# Altium PCB Lite Carrier for Mu.PcbDoc (part 13 of 15)
Units mm, origin at the board's own origin, x right, y up, seen from the top; angles counter-clockwise.
Board outline 146 x 102 mm, 20 copper layers (F.Cu, F.Mask, B.Cu, B.Mask, In1.Cu, F.SilkS, In2.Cu, B.SilkS, F.Adhes, B.Adhes, F.Paste, B.Paste, Dwgs.User, Cmts.User, Eco1.User, Eco2.User, Edge.Cuts, Margin, B.CrtYd, F.CrtYd); 254 components, 382 nets, 1258 pads, 1020 vias.
Unrouted connection lines stored in the file: 113.
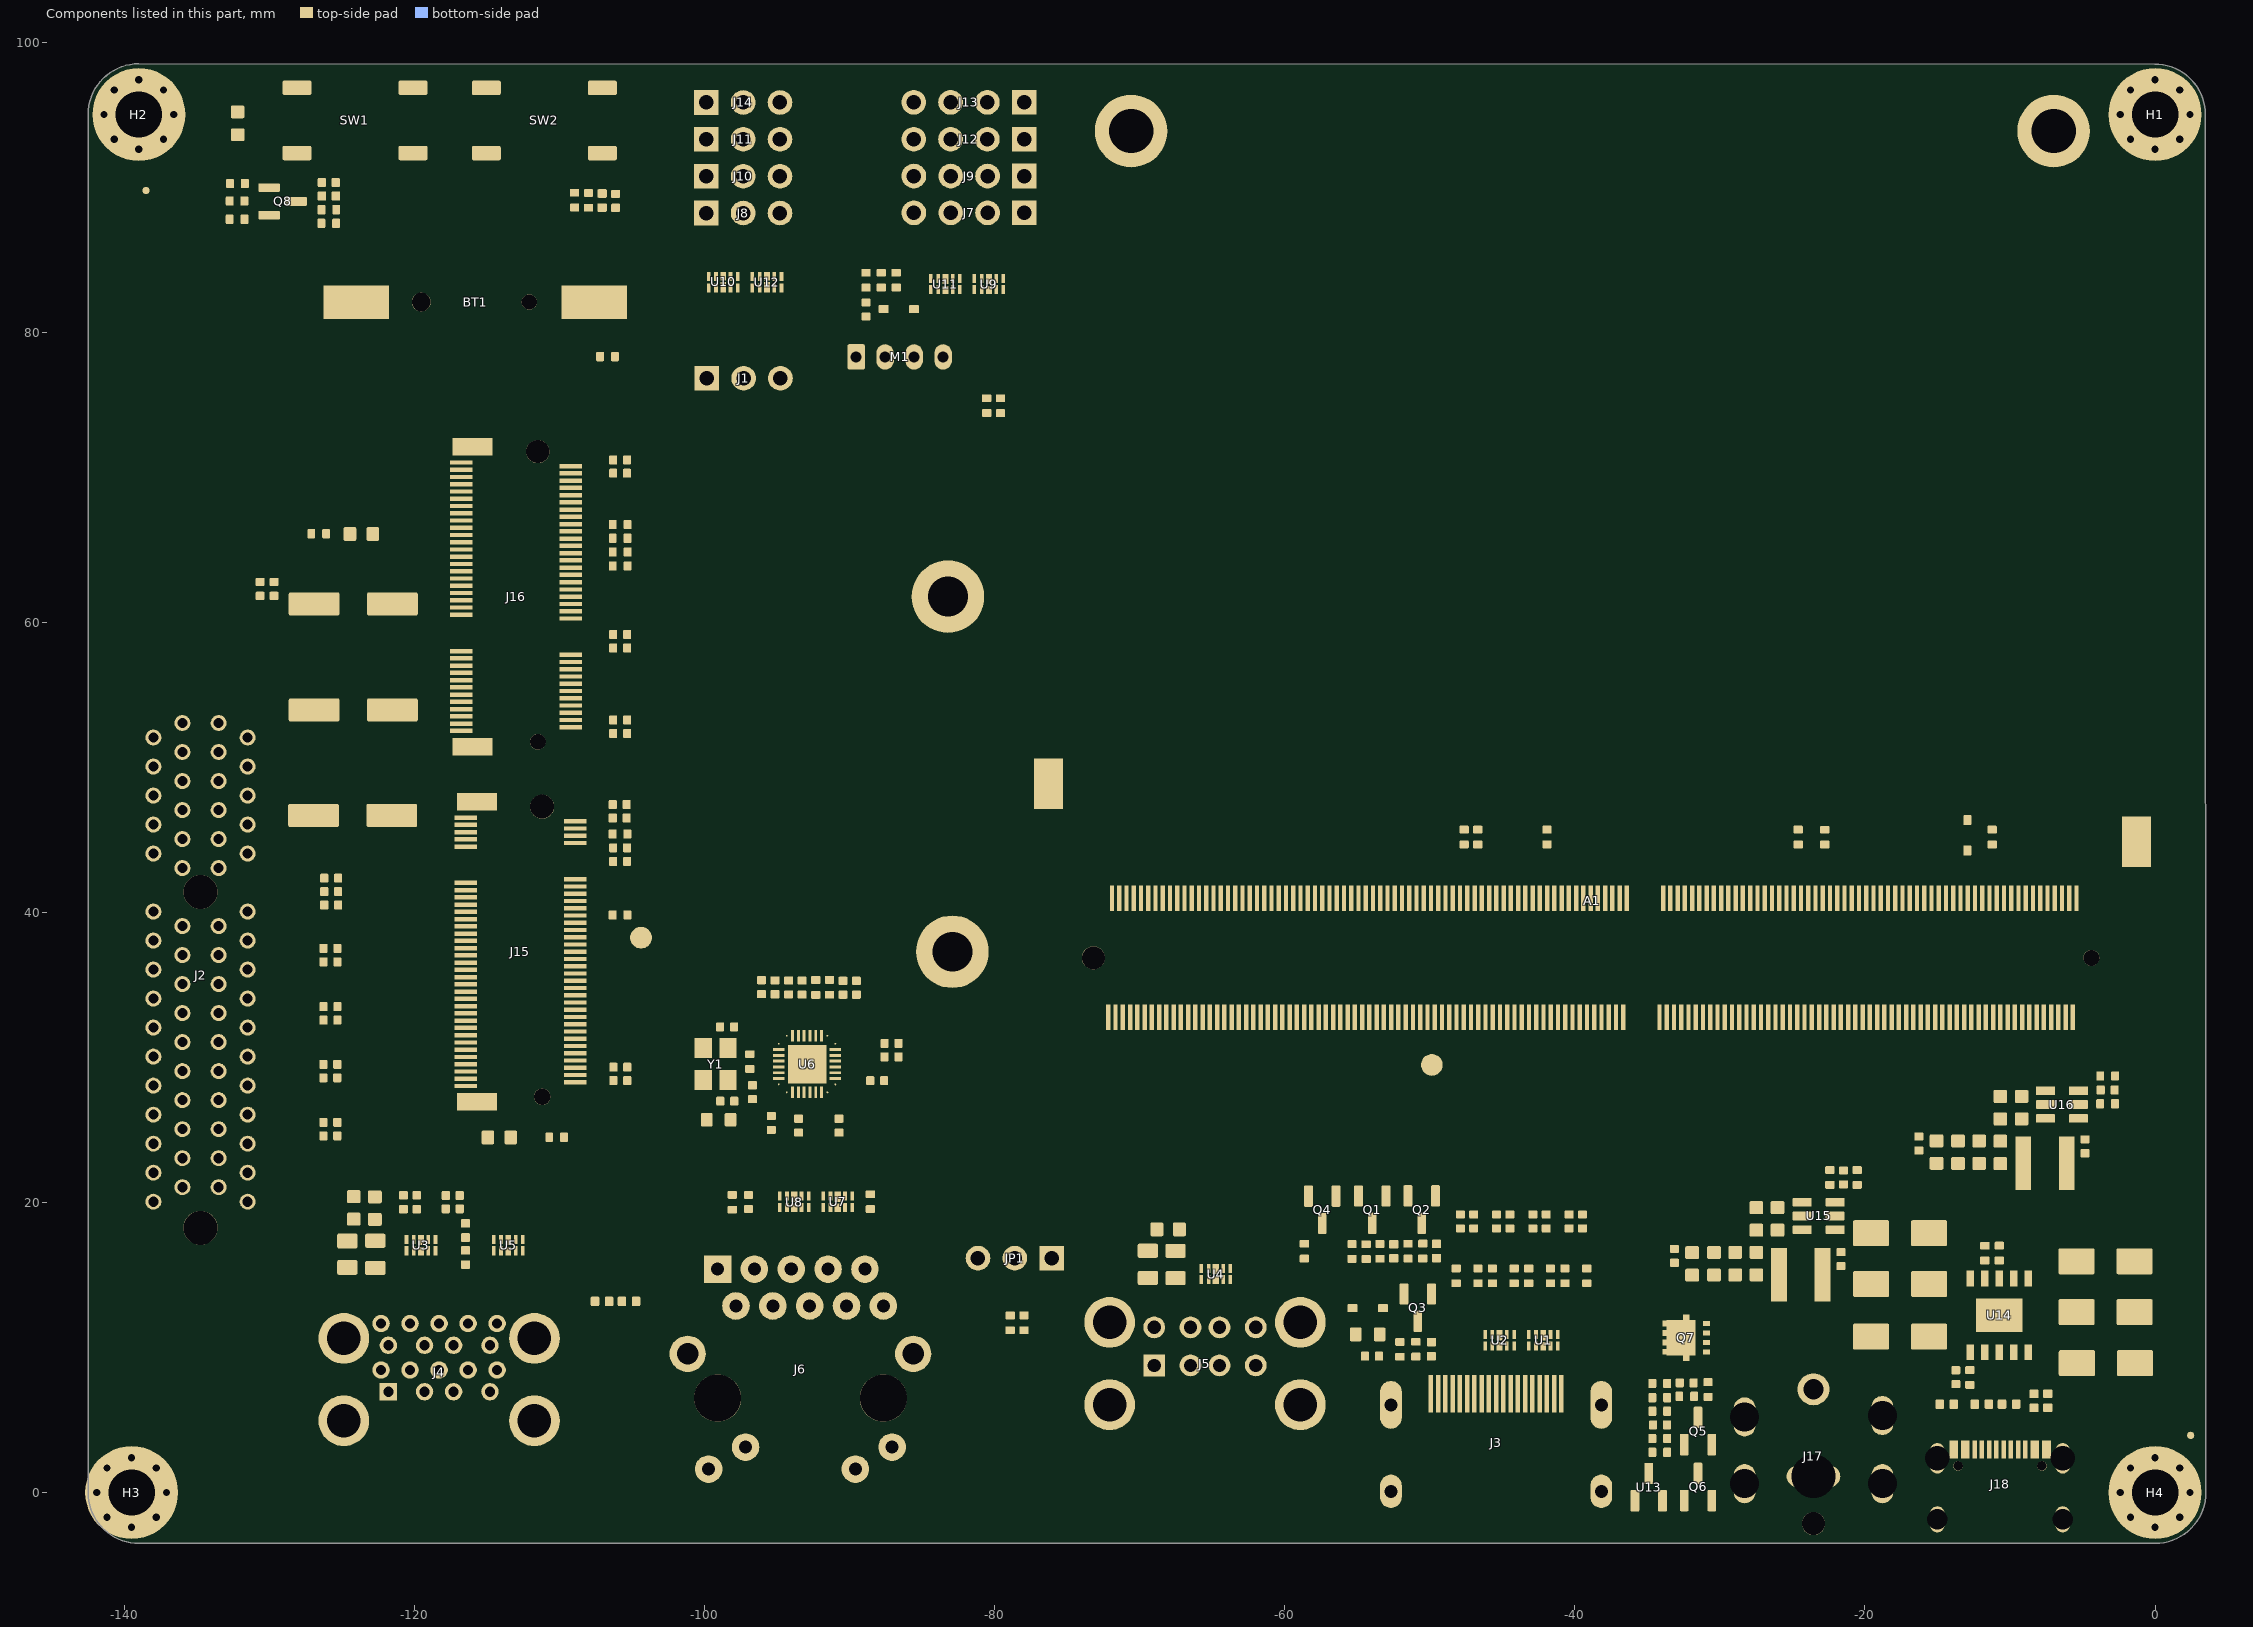
[diagram p23: the components of this part, seen from the top]

## Polygon pours and split planes (outlines as drawn) (continued)
HSIO_3_TX- on F.Cu "F.Cu-/LattePanda Module/HSIO_3_TX--1" (solid, remove dead copper, pour order 31537): 24 vertices, not listed, extent -105.378,58.736 -104.837,59.301
HSIO_11_TX- on F.Cu "F.Cu-/LattePanda Module/HSIO_11_TX-" (solid, remove dead copper, pour order 31538): 24 vertices, not listed, extent -125.358,24.439 -124.817,25.004
HSIO_3_TX+ on F.Cu "F.Cu-/LattePanda Module/HSIO_3_TX+" (solid, remove dead copper, pour order 31539): 24 vertices, not listed, extent -105.378,58.069 -104.837,58.634
HSIO_9_TX- on F.Cu "F.Cu-/LattePanda Module/HSIO_9_TX--2" (solid, remove dead copper, pour order 31540): 24 vertices, not listed, extent -125.348,32.419 -124.807,32.984
HSIO_8_TX- on F.Cu "F.Cu-/LattePanda Module/HSIO_8_TX--2" (solid, remove dead copper, pour order 31541): 24 vertices, not listed, extent -125.348,36.429 -124.807,36.994
HSIO_10_TX- on F.Cu "F.Cu-/LattePanda Module/HSIO_10_TX--2" (solid, remove dead copper, pour order 31542): 24 vertices, not listed, extent -125.358,28.439 -124.816,29.003
HSIO_10_TX+ on F.Cu "F.Cu-/LattePanda Module/HSIO_10_TX+" (solid, remove dead copper, pour order 31543): 24 vertices, not listed, extent -125.358,29.104 -124.816,29.668
HSI- on F.Cu "F.Cu-/Gigabit Ethernet/HSI-" (solid, remove dead copper, pour order 31544): 24 vertices, not listed, extent -88.095,30.55 -87.553,31.112
HSI+ on F.Cu "F.Cu-/Gigabit Ethernet/HSI+" (solid, remove dead copper, pour order 31545): 24 vertices, not listed, extent -88.095,29.885 -87.553,30.448
GbE_PCIe_TX- on F.Cu "F.Cu-/Gigabit Ethernet/GbE_PCIe_TX-" (solid, remove dead copper, pour order 31546): 24 vertices, not listed, extent -86.667,30.55 -86.125,31.112
GbE_PCIe_TX+ on F.Cu "F.Cu-/Gigabit Ethernet/GbE_PCIe_TX+" (solid, remove dead copper, pour order 31547): 24 vertices, not listed, extent -86.667,29.885 -86.125,30.448
Net-(Q7-G) on F.Cu "F.Cu-Net-(Q7-G)-1" (solid, remove dead copper, pour order 31548): 24 vertices, not listed, extent -31.41,7.353 -30.819,7.862
CON_USB4_SSTX_N on F.Cu "F.Cu-/USB2.0&USB3.0/CON_USB4_SSTX_N-1" (solid, remove dead copper, pour order 31549): 24 vertices, not listed, extent -118.345,19.407 -117.804,19.969
CON_USB4_SSTX_P on F.Cu "F.Cu-/USB2.0&USB3.0/CON_USB4_SSTX_P-2" (solid, remove dead copper, pour order 31550): 24 vertices, not listed, extent -118.345,20.071 -117.804,20.633
HSIO_1_TX- on F.Cu "F.Cu-/LattePanda Module/HSIO_1_TX-" (solid, remove dead copper, pour order 31551): 24 vertices, not listed, extent -116.916,19.407 -116.375,19.969
HSIO_1_TX+ on F.Cu "F.Cu-/LattePanda Module/HSIO_1_TX+-1" (solid, remove dead copper, pour order 31552): 24 vertices, not listed, extent -116.916,20.071 -116.375,20.633
+3V3 on F.Cu "F.Cu-+3V3-8" (solid, remove dead copper, pour order 31553): 24 vertices, not listed, extent -131.95,90.239 -131.43,90.83
+3V3 on F.Cu "F.Cu-+3V3-41" (solid, remove dead copper, pour order 31554): 24 vertices, not listed, extent -105.57,65.789 -105.05,66.38
Net-(U13-REF) on F.Cu "F.Cu-Net-(U13-REF)-3" (solid, remove dead copper, pour order 31555): 24 vertices, not listed, extent -33.9,2.772 -33.38,3.363
+3V3 on F.Cu "F.Cu-+3V3-63" (solid, remove dead copper, pour order 31556): 24 vertices, not listed, extent -109.95,24.489 -109.43,25.08
{\C\L\K\R\E\Q\M\}\ on F.Cu "F.Cu-/M.2 E&M Key/~{CLKREQM}-1" (solid, remove dead copper, pour order 31557): 24 vertices, not listed, extent -106.6,39.819 -106.08,40.41
Net-(U16-FB) on F.Cu "F.Cu-Net-(U16-FB)-1" (solid, remove dead copper, pour order 31558): 24 vertices, not listed, extent -4.05,26.799 -3.53,27.39
+12V on F.Cu "F.Cu-+12V-5" (solid, remove dead copper, pour order 31559): 24 vertices, not listed, extent -33.06,6.632 -32.54,7.223
+12V on F.Cu "F.Cu-+12V-1" (solid, remove dead copper, pour order 31560): 24 vertices, not listed, extent -33.06,6.042 -32.54,6.633
Net-(U13-REF) on F.Cu "F.Cu-Net-(U13-REF)-2" (solid, remove dead copper, pour order 31561): 24 vertices, not listed, extent -33.9,2.183 -33.38,2.773
Net-(U13-REF) on F.Cu "F.Cu-Net-(U13-REF)" (solid, remove dead copper, pour order 31562): 24 vertices, not listed, extent -33.9,3.133 -33.38,3.724
+3V3 on F.Cu "F.Cu-+3V3-48" (solid, remove dead copper, pour order 31563): 24 vertices, not listed, extent -105.57,66.14 -105.05,66.731
Net-(U16-FB) on F.Cu "F.Cu-Net-(U16-FB)" (solid, remove dead copper, pour order 31564): 24 vertices, not listed, extent -4.04,28.13 -3.52,28.721
VPullup on F.Cu "F.Cu-VPullup-3" (solid, remove dead copper, pour order 31565): 24 vertices, not listed, extent -13.205,46.359 -12.675,47.051
PCIE30_TX2_P on F.Cu "F.Cu-/PCIe x4/PCIE30_TX2_P" (solid, remove dead copper, pour order 31566): 24 vertices, not listed, extent -126.779,29.104 -126.241,29.668
DDC_SCL on F.Cu "F.Cu-/HDMI/DDC_SCL-3" (solid, remove dead copper, pour order 31567): 24 vertices, not listed, extent -50.786,17.159 -50.249,17.7
Net-(D22-K) on F.Cu "F.Cu-Net-(D22-K)-1" (solid, remove dead copper, pour order 31568): 24 vertices, not listed, extent -128.464,89.009 -127.863,89.648
Net-(Q4-G) on F.Cu "F.Cu-Net-(Q4-G)" (solid, remove dead copper, pour order 31569): 24 vertices, not listed, extent -57.074,20.039 -56.467,20.664
Net-(U14-VDD) on F.Cu "F.Cu-Net-(U14-VDD)" (solid, remove dead copper, pour order 31570): 24 vertices, not listed, extent -13.027,8.439 -12.487,8.98
+3V3 on F.Cu "F.Cu-+3V3-15" (solid, remove dead copper, pour order 31571): 24 vertices, not listed, extent -52.176,9.299 -51.599,9.823
DDI_B_HPD on F.Cu "F.Cu-/HDMI/DDI_B_HPD-2" (solid, remove dead copper, pour order 31572): 24 vertices, not listed, extent -55.63,17.126 -55.09,17.668
Net-(U14-VBUS) on F.Cu "F.Cu-Net-(U14-VBUS)-1" (solid, remove dead copper, pour order 31573): 24 vertices, not listed, extent -11.01,15.46 -10.47,16.001
Net-(U14-CFG1) on F.Cu "F.Cu-Net-(U14-CFG1)-1" (solid, remove dead copper, pour order 31574): 24 vertices, not listed, extent -12.01,15.45 -11.47,15.991
Net-(Q8-G) on F.Cu "F.Cu-Net-(Q8-G)-1" (solid, remove dead copper, pour order 31575): 24 vertices, not listed, extent -132.044,88.476 -131.584,89.107
REFCLK3- on F.Cu "F.Cu-/LattePanda Module/REFCLK3-" (solid, remove dead copper, pour order 31576): 24 vertices, not listed, extent -116.78,64.311 -115.845,64.566
HSIO_3_RX- on F.Cu "F.Cu-/LattePanda Module/HSIO_3_RX-" (solid, remove dead copper, pour order 31577): 24 vertices, not listed, extent -116.78,62.811 -115.845,63.066
CON_PCIE_TX_0- on F.Cu "F.Cu-/M.2 E&M Key/CON_PCIE_TX_0--1" (solid, remove dead copper, pour order 31578): 24 vertices, not listed, extent -116.78,61.311 -115.845,61.566
REFCLK0- on F.Cu "F.Cu-/LattePanda Module/REFCLK0--1" (solid, remove dead copper, pour order 31579): 24 vertices, not listed, extent -116.48,41.331 -115.545,41.586
HSIO_2_RX+ on F.Cu "F.Cu-/LattePanda Module/HSIO_2_RX+-1" (solid, remove dead copper, pour order 31580): 24 vertices, not listed, extent -116.48,38.331 -115.545,38.586
CON_PCIE_TX_1+ on F.Cu "F.Cu-/M.2 E&M Key/CON_PCIE_TX_1+" (solid, remove dead copper, pour order 31581): 24 vertices, not listed, extent -116.48,39.831 -115.545,40.086
USB_2_P7+ on F.Cu "F.Cu-/LattePanda Module/USB_2_P7+" (solid, remove dead copper, pour order 31582): 24 vertices, not listed, extent -116.78,52.954 -115.845,53.209
HSIO_3_RX+ on F.Cu "F.Cu-/LattePanda Module/HSIO_3_RX+-2" (solid, remove dead copper, pour order 31583): 24 vertices, not listed, extent -116.78,62.454 -115.845,62.709
CON_PCIE_TX_0+ on F.Cu "F.Cu-/M.2 E&M Key/CON_PCIE_TX_0+" (solid, remove dead copper, pour order 31584): 24 vertices, not listed, extent -116.78,60.954 -115.845,61.209
REFCLK3+ on F.Cu "F.Cu-/LattePanda Module/REFCLK3+" (solid, remove dead copper, pour order 31585): 24 vertices, not listed, extent -116.78,63.954 -115.845,64.209
CON_PCIE_TX_1- on F.Cu "F.Cu-/M.2 E&M Key/CON_PCIE_TX_1-" (solid, remove dead copper, pour order 31586): 24 vertices, not listed, extent -116.48,39.474 -115.545,39.729
REFCLK0+ on F.Cu "F.Cu-/LattePanda Module/REFCLK0+-1" (solid, remove dead copper, pour order 31587): 24 vertices, not listed, extent -116.48,40.974 -115.545,41.229
HSIO_2_RX- on F.Cu "F.Cu-/LattePanda Module/HSIO_2_RX-" (solid, remove dead copper, pour order 31588): 24 vertices, not listed, extent -116.48,37.974 -115.545,38.229
USB_2_P7- on F.Cu "F.Cu-/LattePanda Module/USB_2_P7--2" (solid, remove dead copper, pour order 31589): 24 vertices, not listed, extent -116.78,53.311 -115.845,53.566
Net-(U6-CKXTAL2) on F.Cu "F.Cu-Net-(U6-CKXTAL2)-4" (solid, remove dead copper, pour order 31590): 24 vertices, not listed, extent -98.224,26.979 -97.686,27.57
Net-(D21-A2) on F.Cu "F.Cu-Net-(D21-A2)-3" (solid, remove dead copper, pour order 31591): 24 vertices, not listed, extent -126.657,89.72 -126.12,90.311
+3V3 on F.Cu "F.Cu-+3V3-18" (solid, remove dead copper, pour order 31592): 24 vertices, not listed, extent -106.85,29.04 -106.289,29.6
+12V on F.Cu "F.Cu-+12V-10" (solid, remove dead copper, pour order 31593): 24 vertices, not listed, extent -33.33,7.283 -32.769,7.842
DDC_SDA on F.Cu "F.Cu-/HDMI/DDC_SDA-3" (solid, remove dead copper, pour order 31594): 24 vertices, not listed, extent -50.966,10.13 -50.375,10.65
GND on F.Cu "F.Cu-GND-78" (solid, remove dead copper, pour order 31595): 24 vertices, not listed, extent -35.261,3.594 -34.625,4.242
+3V3 on F.Cu "F.Cu-+3V3-68" (solid, remove dead copper, pour order 31596): 24 vertices, not listed, extent -94.515,33.78 -93.99,34.341
GND on F.Cu "F.Cu-GND-52" (solid, remove dead copper, pour order 31597): 24 vertices, not listed, extent -64.975,14.843 -64.525,15.418
+3V3 on F.Cu "F.Cu-+3V3-34" (solid, remove dead copper, pour order 31598): 24 vertices, not listed, extent -91.975,35.08 -91.384,35.599
PWR_EN on F.Cu "F.Cu-/PSU/PWR_EN-4" (solid, remove dead copper, pour order 31599): 24 vertices, not listed, extent -78.57,10.93 -77.979,11.45
Net-(A1-TCP1_HPD) on F.Cu "F.Cu-Net-(A1-TCP1_HPD)" (solid, remove dead copper, pour order 31600): 24 vertices, not listed, extent -25.194,44.42 -24.603,44.94
GND on F.Cu "F.Cu-GND-131" (solid, remove dead copper, pour order 31601): 24 vertices, not listed, extent -25.194,45.44 -24.603,45.96
VPullup on F.Cu "F.Cu-VPullup-1" (solid, remove dead copper, pour order 31602): 24 vertices, not listed, extent -41.921,45.44 -41.33,45.96
GND on F.Cu "F.Cu-GND-168" (solid, remove dead copper, pour order 31603): 24 vertices, not listed, extent -24.605,45.44 -24.014,45.96
FAN_1_PWM on F.Cu "F.Cu-/Fan_Temp/FAN_1_PWM-2" (solid, remove dead copper, pour order 31604): 24 vertices, not listed, extent -80.551,75.18 -79.96,75.7
PWR_EN on F.Cu "F.Cu-/PSU/PWR_EN-5" (solid, remove dead copper, pour order 31605): 24 vertices, not listed, extent -78.931,10.93 -78.34,11.45
+15V on F.Cu "F.Cu-+15V-4" (solid, remove dead copper, pour order 31606): 24 vertices, not listed, extent -10.741,16.76 -10.15,17.28
VDC on F.Cu "F.Cu-VDC-2" (solid, remove dead copper, pour order 31607): 24 vertices, not listed, extent -11.231,44.42 -10.64,44.94
+3V3 on F.Cu "F.Cu-+3V3-51" (solid, remove dead copper, pour order 31608): 24 vertices, not listed, extent -92.336,35.07 -91.745,35.589
+3V3 on F.Cu "F.Cu-+3V3-26" (solid, remove dead copper, pour order 31609): 24 vertices, not listed, extent -2.761,28.45 -2.22,28.99
DDC_SDA on F.Cu "F.Cu-/HDMI/DDC_SDA" (solid, remove dead copper, pour order 31610): 24 vertices, not listed, extent -51.179,10.389 -50.655,10.93
+3V3 on F.Cu "F.Cu-+3V3-17" (solid, remove dead copper, pour order 31611): 24 vertices, not listed, extent -95.68,25.959 -95.12,26.52
+1V0 on F.Cu "F.Cu-+1V0" (solid, remove dead copper, pour order 31612): 24 vertices, not listed, extent -95.425,33.79 -94.865,34.351
GND on F.Cu "F.Cu-GND-156" (solid, remove dead copper, pour order 31613): 24 vertices, not listed, extent -49.886,9.111 -49.232,9.647
Net-(D25-A2) on F.Cu "F.Cu-Net-(D25-A2)" (solid, remove dead copper, pour order 31614): 24 vertices, not listed, extent -106.72,89.291 -106.129,89.799
{\P\W\R\_\L\E\D\}\{\s\l\a\s\h\}\{PSON} on F.Cu "F.Cu-/~{PWR_LED}{slash}~{PSON}-2" (solid, remove dead copper, pour order 31615): 24 vertices, not listed, extent -131.98,87.19 -131.46,87.781
DDI_B_DDC_SCL on F.Cu "F.Cu-/HDMI/DDI_B_DDC_SCL-2" (solid, remove dead copper, pour order 31616): 24 vertices, not listed, extent -51.77,17.149 -51.23,17.69
TMDS_CK- on F.Cu "F.Cu-/HDMI/TMDS_CK--2" (solid, remove dead copper, pour order 31617): 24 vertices, not listed, extent -48.038,17.779 -47.485,18.258
Net-(U6-CKXTAL2) on F.Cu "F.Cu-Net-(U6-CKXTAL2)-3" (solid, remove dead copper, pour order 31618): 24 vertices, not listed, extent -96.937,29.044 -96.338,29.511
Net-(Q4-D) on F.Cu "F.Cu-Net-(Q4-D)-7" (solid, remove dead copper, pour order 31619): 24 vertices, not listed, extent -48.455,15.449 -47.915,15.99
DDI_B_DDC_SDA on F.Cu "F.Cu-/HDMI/DDI_B_DDC_SDA-3" (solid, remove dead copper, pour order 31620): 24 vertices, not listed, extent -52.335,10.382 -51.795,10.923
GND on F.Cu "F.Cu-GND-100" (solid, remove dead copper, pour order 31621): 24 vertices, not listed, extent -52.799,17.122 -52.253,17.73
Net-(A1-TCP0_HPD) on F.Cu "F.Cu-Net-(A1-TCP0_HPD)" (solid, remove dead copper, pour order 31622): 24 vertices, not listed, extent -23.033,44.131 -22.493,44.672
+3V3 on F.Cu "F.Cu-+3V3-13" (solid, remove dead copper, pour order 31623): 24 vertices, not listed, extent -88.844,20.559 -88.304,21.1
Net-(D25-A2) on F.Cu "F.Cu-Net-(D25-A2)-3" (solid, remove dead copper, pour order 31624): 24 vertices, not listed, extent -108.27,89.589 -107.73,90.13
+3V3 on F.Cu "F.Cu-+3V3-28" (solid, remove dead copper, pour order 31625): 24 vertices, not listed, extent -91.655,35.339 -91.115,35.88
Net-(JP1-C) on F.Cu "F.Cu-Net-(JP1-C)-1" (solid, remove dead copper, pour order 31626): 24 vertices, not listed, extent -79.2,12.209 -78.66,12.75
Net-(Q4-G) on F.Cu "F.Cu-Net-(Q4-G)-1" (solid, remove dead copper, pour order 31627): 24 vertices, not listed, extent -58.92,17.149 -58.38,17.69
{\P\W\R\_\L\E\D\}\{\s\l\a\s\h\}\{PSON} on F.Cu "F.Cu-/~{PWR_LED}{slash}~{PSON}-1" (solid, remove dead copper, pour order 31628): 24 vertices, not listed, extent -58.92,15.59 -58.38,16.131
PWR_EN on F.Cu "F.Cu-/PSU/PWR_EN-9" (solid, remove dead copper, pour order 31629): 24 vertices, not listed, extent -78.25,10.65 -77.71,11.191
Net-(A1-{\B\I\O\S\_\S\E\L\}\)\ on F.Cu "F.Cu-Net-(A1-~{BIOS_SEL})-1" (solid, remove dead copper, pour order 31630): 24 vertices, not listed, extent -42.19,44.14 -41.65,44.681
VPullup on F.Cu "F.Cu-VPullup-7" (solid, remove dead copper, pour order 31631): 24 vertices, not listed, extent -13.49,46.094 -12.939,46.644
VPullup on F.Cu "F.Cu-VPullup-2" (solid, remove dead copper, pour order 31632): 24 vertices, not listed, extent -12.941,46.085 -12.39,46.635
+1V0 on F.Cu "F.Cu-+1V0-2" (solid, remove dead copper, pour order 31633): 24 vertices, not listed, extent -95.735,34.08 -95.144,34.619
+1V0 on F.Cu "F.Cu-+1V0-10" (solid, remove dead copper, pour order 31634): 24 vertices, not listed, extent -96.076,34.09 -95.485,34.629
Net-(U6-CKXTAL1) on F.Cu "F.Cu-Net-(U6-CKXTAL1)-4" (solid, remove dead copper, pour order 31635): 24 vertices, not listed, extent -97.073,30.219 -96.56,30.76
Net-(J16-SUSCLK) on F.Cu "F.Cu-Net-(J16-SUSCLK)-1" (solid, remove dead copper, pour order 31636): 24 vertices, not listed, extent -106.87,64.538 -106.329,65.074
+12V on F.Cu "F.Cu-+12V-6" (solid, remove dead copper, pour order 31637): 24 vertices, not listed, extent -33.641,7.27 -33.1,7.81
Net-(J16-{\W\_\D\I\S\A\B\L\E\2\}\)\ on F.Cu "F.Cu-Net-(J16-~{W_DISABLE2})" (solid, remove dead copper, pour order 31638): 24 vertices, not listed, extent -106.87,65.507 -106.329,66.047
Net-(D9-A) on F.Cu "F.Cu-Net-(D9-A)-1" (solid, remove dead copper, pour order 31639): 24 vertices, not listed, extent -111.25,24.216 -110.709,24.756
{\C\L\K\R\E\Q\E\}\ on F.Cu "F.Cu-/M.2 E&M Key/~{CLKREQE}-1" (solid, remove dead copper, pour order 31640): 24 vertices, not listed, extent -106.87,63.61 -106.329,64.15
Net-(BT1-+) on F.Cu "F.Cu-Net-(BT1-+)" (solid, remove dead copper, pour order 31641): 24 vertices, not listed, extent -107.74,78.04 -107.199,78.58
+3V3 on F.Cu "F.Cu-+3V3-60" (solid, remove dead copper, pour order 31642): 24 vertices, not listed, extent -109.691,24.22 -109.15,24.76
SUSCLK_WIFI on F.Cu "F.Cu-/LattePanda Module/SUSCLK_WIFI-4" (solid, remove dead copper, pour order 31643): 24 vertices, not listed, extent -105.311,64.57 -104.77,65.11
GND on F.Cu "F.Cu-GND-55" (solid, remove dead copper, pour order 31644): 24 vertices, not listed, extent -105.321,39.55 -104.78,40.09
SUSCLK_WIFI on F.Cu "F.Cu-/LattePanda Module/SUSCLK_WIFI-1" (solid, remove dead copper, pour order 31645): 24 vertices, not listed, extent -105.321,45.13 -104.78,45.67
+3V3 on F.Cu "F.Cu-+3V3-5" (solid, remove dead copper, pour order 31646): 24 vertices, not listed, extent -55.63,15.59 -55.09,16.108
GND on F.Cu "F.Cu-GND-66" (solid, remove dead copper, pour order 31647): 24 vertices, not listed, extent -96.355,35.319 -95.795,35.82
GND on F.Cu "F.Cu-GND-181" (solid, remove dead copper, pour order 31648): 24 vertices, not listed, extent -64.975,14.654 -64.525,15.168
GND on F.Cu "F.Cu-GND-142" (solid, remove dead copper, pour order 31649): 24 vertices, not listed, extent -64.975,14.142 -64.525,14.656
+3V3 on F.Cu "F.Cu-+3V3-74" (solid, remove dead copper, pour order 31650): 24 vertices, not listed, extent -98.36,20.519 -97.82,21.06
+3V3 on F.Cu "F.Cu-+3V3-61" (solid, remove dead copper, pour order 31651): 24 vertices, not listed, extent -51.77,15.62 -51.23,16.131
Net-(J6-PadL1) on F.Cu "F.Cu-Net-(J6-PadL1)" (solid, remove dead copper, pour order 31652): 24 vertices, not listed, extent -88.834,18.935 -88.294,19.541
+3V3 on F.Cu "F.Cu-+3V3-33" (solid, remove dead copper, pour order 31653): 24 vertices, not listed, extent -109.221,52.61 -108.295,52.91
+3V3 on F.Cu "F.Cu-+3V3-46" (solid, remove dead copper, pour order 31654): 24 vertices, not listed, extent -109.221,53.11 -108.295,53.41
+3V3 on F.Cu "F.Cu-+3V3-3" (solid, remove dead copper, pour order 31655): 24 vertices, not listed, extent -108.921,45.13 -107.995,45.43
+3V3 on F.Cu "F.Cu-+3V3-65" (solid, remove dead copper, pour order 31656): 24 vertices, not listed, extent -109.221,70.61 -108.295,70.91
+3V3 on F.Cu "F.Cu-+3V3-50" (solid, remove dead copper, pour order 31657): 24 vertices, not listed, extent -109.221,70.11 -108.295,70.41
+3V3 on F.Cu "F.Cu-+3V3-76" (solid, remove dead copper, pour order 31658): 24 vertices, not listed, extent -108.921,45.63 -107.995,45.93
+1V0 on F.Cu "F.Cu-+1V0-3" (solid, remove dead copper, pour order 31659): 24 vertices, not listed, extent -93.544,33.726 -93.004,34.33
{\P\W\R\_\S\W\}\ on F.Cu "F.Cu-/LattePanda Module/~{PWR_SW}" (solid, remove dead copper, pour order 31660): 24 vertices, not listed, extent -125.391,88.17 -124.85,88.71
Net-(U6-CKXTAL2) on F.Cu "F.Cu-Net-(U6-CKXTAL2)-5" (solid, remove dead copper, pour order 31661): 24 vertices, not listed, extent -97.463,28.93 -96.879,29.392
Net-(D21-A2) on F.Cu "F.Cu-Net-(D21-A2)" (solid, remove dead copper, pour order 31662): 24 vertices, not listed, extent -126.657,90.309 -126.149,90.92
GND on F.Cu "F.Cu-GND-76" (solid, remove dead copper, pour order 31663): 24 vertices, not listed, extent -93.819,24.232 -93.278,24.811
GND on F.Cu "F.Cu-GND-90" (solid, remove dead copper, pour order 31664): 24 vertices, not listed, extent -54.669,15.509 -54.129,16.098
+1V0 on F.Cu "F.Cu-+1V0-11" (solid, remove dead copper, pour order 31665): 24 vertices, not listed, extent -91.034,25.769 -90.521,26.341
Net-(D9-K) on F.Cu "F.Cu-Net-(D9-K)" (solid, remove dead copper, pour order 31666): 24 vertices, not listed, extent -109.845,30.13 -108.919,30.43
{\P\L\T\_\R\S\T\}\ on F.Cu "F.Cu-/~{PLT_RST}-7" (solid, remove dead copper, pour order 31667): 24 vertices, not listed, extent -110.145,65.11 -109.219,65.41
{\P\L\T\_\R\S\T\}\ on F.Cu "F.Cu-/~{PLT_RST}-8" (solid, remove dead copper, pour order 31668): 24 vertices, not listed, extent -109.845,40.13 -108.919,40.43
{\W\A\K\E\}\ on F.Cu "F.Cu-/~{WAKE}-1" (solid, remove dead copper, pour order 31669): 24 vertices, not listed, extent -109.845,41.13 -108.919,41.43
GND on F.Cu "F.Cu-GND-8" (solid, remove dead copper, pour order 31670): 24 vertices, not listed, extent -117.395,37.38 -116.469,37.68
GND on F.Cu "F.Cu-GND-177" (solid, remove dead copper, pour order 31671): 24 vertices, not listed, extent -117.395,41.88 -116.469,42.18
GND on F.Cu "F.Cu-GND-179" (solid, remove dead copper, pour order 31672): 24 vertices, not listed, extent -117.395,35.88 -116.469,36.18
GND on F.Cu "F.Cu-GND-18" (solid, remove dead copper, pour order 31673): 24 vertices, not listed, extent -117.395,29.88 -116.469,30.18
GND on F.Cu "F.Cu-GND-46" (solid, remove dead copper, pour order 31674): 24 vertices, not listed, extent -117.395,34.38 -116.469,34.68
GND on F.Cu "F.Cu-GND-127" (solid, remove dead copper, pour order 31675): 24 vertices, not listed, extent -117.395,31.38 -116.469,31.68
GND on F.Cu "F.Cu-GND-105" (solid, remove dead copper, pour order 31676): 24 vertices, not listed, extent -117.395,27.88 -116.469,28.18
GND on F.Cu "F.Cu-GND-97" (solid, remove dead copper, pour order 31677): 24 vertices, not listed, extent -117.695,61.86 -116.769,62.16
GND on F.Cu "F.Cu-GND-149" (solid, remove dead copper, pour order 31678): 24 vertices, not listed, extent -117.395,38.88 -116.469,39.18
GND on F.Cu "F.Cu-GND-104" (solid, remove dead copper, pour order 31679): 24 vertices, not listed, extent -117.395,40.38 -116.469,40.68
GND on F.Cu "F.Cu-GND-111" (solid, remove dead copper, pour order 31680): 24 vertices, not listed, extent -117.695,61.86 -116.769,62.16
GND on F.Cu "F.Cu-GND-39" (solid, remove dead copper, pour order 31681): 24 vertices, not listed, extent -117.395,32.88 -116.469,33.18
GND on F.Cu "F.Cu-GND-9" (solid, remove dead copper, pour order 31682): 24 vertices, not listed, extent -117.395,28.38 -116.469,28.68
{\W\A\K\E\}\ on F.Cu "F.Cu-/~{WAKE}-3" (solid, remove dead copper, pour order 31683): 24 vertices, not listed, extent -117.695,65.86 -116.769,66.16
GND on F.Cu "F.Cu-GND-7" (solid, remove dead copper, pour order 31684): 24 vertices, not listed, extent -116.771,70.86 -115.845,71.16
GND on F.Cu "F.Cu-GND-51" (solid, remove dead copper, pour order 31685): 24 vertices, not listed, extent -116.771,63.36 -115.845,63.66
GND on F.Cu "F.Cu-GND-82" (solid, remove dead copper, pour order 31686): 24 vertices, not listed, extent -116.771,67.86 -115.845,68.16
GND on F.Cu "F.Cu-GND-2" (solid, remove dead copper, pour order 31687): 24 vertices, not listed, extent -116.771,52.36 -115.845,52.66
{\C\L\K\R\E\Q\E\}\ on F.Cu "F.Cu-/M.2 E&M Key/~{CLKREQE}-3" (solid, remove dead copper, pour order 31688): 24 vertices, not listed, extent -116.771,65.36 -115.845,65.66
GND on F.Cu "F.Cu-GND-186" (solid, remove dead copper, pour order 31689): 24 vertices, not listed, extent -116.771,60.36 -115.845,60.66
GND on F.Cu "F.Cu-GND-98" (solid, remove dead copper, pour order 31690): 24 vertices, not listed, extent -116.771,53.86 -115.845,54.16
GND on F.Cu "F.Cu-GND-134" (solid, remove dead copper, pour order 31691): 24 vertices, not listed, extent -116.771,64.86 -115.845,65.16
GND on F.Cu "F.Cu-GND-57" (solid, remove dead copper, pour order 31692): 24 vertices, not listed, extent -116.771,66.36 -115.845,66.66
+3V3 on F.Cu "F.Cu-+3V3-2" (solid, remove dead copper, pour order 31693): 24 vertices, not listed, extent -108.921,30.63 -107.995,30.93
Net-(J15-SUSCLK) on F.Cu "F.Cu-Net-(J15-SUSCLK)-1" (solid, remove dead copper, pour order 31694): 24 vertices, not listed, extent -108.921,44.63 -107.995,44.93
Net-(J16-SUSCLK) on F.Cu "F.Cu-Net-(J16-SUSCLK)" (solid, remove dead copper, pour order 31695): 24 vertices, not listed, extent -109.221,64.61 -108.295,64.91
+3V3 on F.Cu "F.Cu-+3V3-11" (solid, remove dead copper, pour order 31696): 24 vertices, not listed, extent -108.921,31.13 -107.995,31.43
Net-(J16-{\W\_\D\I\S\A\B\L\E\1\}\)\ on F.Cu "F.Cu-Net-(J16-~{W_DISABLE1})-1" (solid, remove dead copper, pour order 31697): 24 vertices, not listed, extent -109.221,66.11 -108.295,66.41
+3V3 on F.Cu "F.Cu-+3V3-54" (solid, remove dead copper, pour order 31698): 24 vertices, not listed, extent -108.921,46.13 -107.995,46.43
{\C\L\K\R\E\Q\M\}\ on F.Cu "F.Cu-/M.2 E&M Key/~{CLKREQM}" (solid, remove dead copper, pour order 31699): 24 vertices, not listed, extent -108.921,40.63 -107.995,40.93
Net-(J15-DEVSLP) on F.Cu "F.Cu-Net-(J15-DEVSLP)-1" (solid, remove dead copper, pour order 31700): 24 vertices, not listed, extent -108.921,37.13 -107.995,37.43
GND on F.Cu "F.Cu-GND-185" (solid, remove dead copper, pour order 31701): 24 vertices, not listed, extent -109.221,56.61 -108.295,56.91
+3V3 on F.Cu "F.Cu-+3V3-32" (solid, remove dead copper, pour order 31702): 24 vertices, not listed, extent -108.921,28.63 -107.995,28.93
+3V3 on F.Cu "F.Cu-+3V3-62" (solid, remove dead copper, pour order 31703): 24 vertices, not listed, extent -108.921,31.63 -107.995,31.93
+3V3 on F.Cu "F.Cu-+3V3-58" (solid, remove dead copper, pour order 31704): 24 vertices, not listed, extent -108.921,32.13 -107.995,32.43
Net-(J16-{\W\_\D\I\S\A\B\L\E\2\}\)\ on F.Cu "F.Cu-Net-(J16-~{W_DISABLE2})-1" (solid, remove dead copper, pour order 31705): 24 vertices, not listed, extent -109.221,65.61 -108.295,65.91
PCIE30_TX2_N on F.Cu "F.Cu-/PCIe x4/PCIE30_TX2_N-1" (solid, remove dead copper, pour order 31706): 24 vertices, not listed, extent -126.668,28.474 -126.194,28.978
+12V on F.Cu "F.Cu-+12V-7" (solid, remove dead copper, pour order 31707): 24 vertices, not listed, extent -35.231,2.493 -34.659,3.033
GND on F.Cu "F.Cu-GND-88" (solid, remove dead copper, pour order 31708): 24 vertices, not listed, extent -95.669,24.51 -95.131,25.001
{\W\A\K\E\}\ on F.Cu "F.Cu-/~{WAKE}-4" (solid, remove dead copper, pour order 31709): 24 vertices, not listed, extent -108.921,41.139 -107.929,41.43
GND on F.Cu "F.Cu-GND-167" (solid, remove dead copper, pour order 31710): 24 vertices, not listed, extent -83.6,81.719 -83.2,82.12
GND on F.Cu "F.Cu-GND-155" (solid, remove dead copper, pour order 31711): 24 vertices, not listed, extent -83.6,84.239 -83.2,84.64
GND on F.Cu "F.Cu-GND-171" (solid, remove dead copper, pour order 31712): 24 vertices, not listed, extent -83.6,81.94 -83.2,82.341
GND on F.Cu "F.Cu-GND-108" (solid, remove dead copper, pour order 31713): 24 vertices, not listed, extent -116.771,69.375 -115.782,69.66
GND on F.Cu "F.Cu-GND-37" (solid, remove dead copper, pour order 31714): 24 vertices, not listed, extent -90.935,24.269 -90.436,24.811
GND on F.Cu "F.Cu-GND-73" (solid, remove dead copper, pour order 31715): 24 vertices, not listed, extent -83.61,84.682 -83.21,85.081
+15V on F.Cu "F.Cu-+15V" (solid, remove dead copper, pour order 31716): 24 vertices, not listed, extent -13.015,6.869 -12.49,7.421
GND on F.Cu "F.Cu-GND-153" (solid, remove dead copper, pour order 31717): 24 vertices, not listed, extent -116.471,45.413 -115.541,45.68
CC2 on F.Cu "F.Cu-/PSU/CC2" (solid, remove dead copper, pour order 31718): 24 vertices, not listed, extent -9.09,2.954 -8.79,3.725
Net-(Q7-G) on F.Cu "F.Cu-Net-(Q7-G)-6" (solid, remove dead copper, pour order 31719): 24 vertices, not listed, extent -32.011,7.8 -31.611,8.201
+3V3 on F.Cu "F.Cu-+3V3-19" (solid, remove dead copper, pour order 31720): 24 vertices, not listed, extent -2.57,28.52 -2.169,28.92
GND on F.Cu "F.Cu-GND-53" (solid, remove dead copper, pour order 31721): 24 vertices, not listed, extent -49.735,15.549 -49.335,15.95
HPD on F.Cu "F.Cu-/HDMI/HPD-5" (solid, remove dead copper, pour order 31722): 24 vertices, not listed, extent -53.331,15.319 -52.819,15.831
HPD on F.Cu "F.Cu-/HDMI/HPD-3" (solid, remove dead copper, pour order 31723): 24 vertices, not listed, extent -53.101,15.319 -52.589,15.831
HPD on F.Cu "F.Cu-/HDMI/HPD-2" (solid, remove dead copper, pour order 31724): 24 vertices, not listed, extent -50.476,8.029 -49.964,8.541
PWR_C_D- on F.Cu "F.Cu-/PSU/PWR_C_D--6" (solid, remove dead copper, pour order 31725): 24 vertices, not listed, extent -11.59,2.954 -11.29,3.725
PWR_C_D+ on F.Cu "F.Cu-/PSU/PWR_C_D+-3" (solid, remove dead copper, pour order 31726): 24 vertices, not listed, extent -11.09,2.954 -10.79,3.725
PWR_C_D+ on F.Cu "F.Cu-/PSU/PWR_C_D+-4" (solid, remove dead copper, pour order 31727): 24 vertices, not listed, extent -10.09,2.954 -9.79,3.725
CC1 on F.Cu "F.Cu-/PSU/CC1-2" (solid, remove dead copper, pour order 31728): 24 vertices, not listed, extent -12.09,2.954 -11.79,3.725
PWR_C_D- on F.Cu "F.Cu-/PSU/PWR_C_D--5" (solid, remove dead copper, pour order 31729): 24 vertices, not listed, extent -11.59,2.185 -11.29,2.956
PWR_C_D- on F.Cu "F.Cu-/PSU/PWR_C_D--1" (solid, remove dead copper, pour order 31730): 24 vertices, not listed, extent -10.59,2.185 -10.29,2.956
Net-(Q1-D) on F.Cu "F.Cu-Net-(Q1-D)" (solid, remove dead copper, pour order 31731): 24 vertices, not listed, extent -54.095,16.907 -53.44,17.397
Net-(Q4-D) on F.Cu "F.Cu-Net-(Q4-D)-2" (solid, remove dead copper, pour order 31732): 24 vertices, not listed, extent -43.79,15.225 -43.185,15.71
Net-(Q4-D) on F.Cu "F.Cu-Net-(Q4-D)" (solid, remove dead copper, pour order 31733): 24 vertices, not listed, extent -46.289,15.226 -45.685,15.71
Net-(Q4-D) on F.Cu "F.Cu-Net-(Q4-D)-8" (solid, remove dead copper, pour order 31734): 24 vertices, not listed, extent -41.685,15.226 -41.081,15.71
Net-(Q4-D) on F.Cu "F.Cu-Net-(Q4-D)-1" (solid, remove dead copper, pour order 31735): 24 vertices, not listed, extent -41.287,15.227 -40.685,15.71
Net-(Q4-D) on F.Cu "F.Cu-Net-(Q4-D)-6" (solid, remove dead copper, pour order 31736): 24 vertices, not listed, extent -46.685,15.227 -46.083,15.71
Net-(Q4-D) on F.Cu "F.Cu-Net-(Q4-D)-5" (solid, remove dead copper, pour order 31737): 24 vertices, not listed, extent -44.185,15.228 -43.584,15.71
CC2 on F.Cu "F.Cu-/PSU/CC2-1" (solid, remove dead copper, pour order 31738): 24 vertices, not listed, extent -9.13,5.452 -8.745,5.851
CC2 on F.Cu "F.Cu-/PSU/CC2-5" (solid, remove dead copper, pour order 31739): 24 vertices, not listed, extent -8.931,5.65 -8.534,6.035
GND on F.Cu "F.Cu-GND-69" (solid, remove dead copper, pour order 31740): 24 vertices, not listed, extent -65.34,34.385 -64.955,34.781
+15V on F.Cu "F.Cu-+15V-5" (solid, remove dead copper, pour order 31741): 24 vertices, not listed, extent -12.92,6.939 -12.535,7.334
FAN_1_PWM on F.Cu "F.Cu-/Fan_Temp/FAN_1_PWM-1" (solid, remove dead copper, pour order 31742): 24 vertices, not listed, extent -78.836,74.269 -78.373,74.716
SUSCLK_WIFI on F.Cu "F.Cu-/LattePanda Module/SUSCLK_WIFI-6" (solid, remove dead copper, pour order 31743): 24 vertices, not listed, extent -102.952,64.72 -102.569,65.105
+1V0 on F.Cu "F.Cu-+1V0-5" (solid, remove dead copper, pour order 31744): 24 vertices, not listed, extent -96.121,28.665 -95.744,29.05
HSIO_10_TX+ on F.Cu "F.Cu-/LattePanda Module/HSIO_10_TX+-2" (solid, remove dead copper, pour order 31745): 24 vertices, not listed, extent -60.351,29.279 -59.966,29.649
HSIO_8_TX+ on F.Cu "F.Cu-/LattePanda Module/HSIO_8_TX+-1" (solid, remove dead copper, pour order 31746): 24 vertices, not listed, extent -63.375,29.279 -62.99,29.649
HSIO_9_TX+ on F.Cu "F.Cu-/LattePanda Module/HSIO_9_TX+" (solid, remove dead copper, pour order 31747): 24 vertices, not listed, extent -61.851,29.279 -61.466,29.649
HSIO_11_TX+ on F.Cu "F.Cu-/LattePanda Module/HSIO_11_TX+-1" (solid, remove dead copper, pour order 31748): 24 vertices, not listed, extent -58.851,29.279 -58.466,29.649
HSIO_9_TX- on F.Cu "F.Cu-/LattePanda Module/HSIO_9_TX-" (solid, remove dead copper, pour order 31749): 24 vertices, not listed, extent -61.364,29.279 -60.979,29.649
HSIO_10_TX- on F.Cu "F.Cu-/LattePanda Module/HSIO_10_TX-" (solid, remove dead copper, pour order 31750): 24 vertices, not listed, extent -59.864,29.279 -59.479,29.649
HSIO_8_TX- on F.Cu "F.Cu-/LattePanda Module/HSIO_8_TX-" (solid, remove dead copper, pour order 31751): 24 vertices, not listed, extent -62.84,29.279 -62.455,29.649
HSIO_11_TX- on F.Cu "F.Cu-/LattePanda Module/HSIO_11_TX--1" (solid, remove dead copper, pour order 31752): 24 vertices, not listed, extent -58.364,29.279 -57.979,29.649
GND on F.Cu "F.Cu-GND-109" (solid, remove dead copper, pour order 31753): 24 vertices, not listed, extent -52.841,17.427 -52.39,17.817
GND on F.Cu "F.Cu-GND-140" (solid, remove dead copper, pour order 31754): 24 vertices, not listed, extent -49.685,15.169 -49.315,15.638
DDI_B_HPD on F.Cu "F.Cu-/HDMI/DDI_B_HPD-1" (solid, remove dead copper, pour order 31755): 24 vertices, not listed, extent -31.02,30.625 -30.619,30.995
DDI_B_HPD on F.Cu "F.Cu-/HDMI/DDI_B_HPD-3" (solid, remove dead copper, pour order 31756): 24 vertices, not listed, extent -26.941,30.625 -26.54,30.995
SOC_UART2_TX on F.Cu "F.Cu-/GPIO/SOC_UART2_TX-2" (solid, remove dead copper, pour order 31757): 24 vertices, not listed, extent -95.336,82.051 -94.952,82.439
FAN_1_TAC on F.Cu "F.Cu-/Fan_Temp/FAN_1_TAC-3" (solid, remove dead copper, pour order 31758): 24 vertices, not listed, extent -77.314,75.023 -76.883,75.454
GND on F.Cu "F.Cu-GND-162" (solid, remove dead copper, pour order 31759): 24 vertices, not listed, extent -43.174,39.223 -42.743,39.654
+15V on F.Cu "F.Cu-+15V-3" (solid, remove dead copper, pour order 31760): 24 vertices, not listed, extent -9.364,16.433 -8.933,16.864
GND on F.Cu "F.Cu-GND-182" (solid, remove dead copper, pour order 31761): 24 vertices, not listed, extent -49.439,9.023 -49.008,9.454
+1V0 on F.Cu "F.Cu-+1V0-7" (solid, remove dead copper, pour order 31762): 24 vertices, not listed, extent -91.089,26.051 -90.658,26.481
GND on F.Cu "F.Cu-GND-163" (solid, remove dead copper, pour order 31763): 24 vertices, not listed, extent -48.794,4.293 -48.363,4.724
+3V3 on F.Cu "F.Cu-+3V3-35" (solid, remove dead copper, pour order 31764): 24 vertices, not listed, extent -124.99,87.295 -124.589,87.665
DDI_B_DDC_SDA on F.Cu "F.Cu-/HDMI/DDI_B_DDC_SDA-2" (solid, remove dead copper, pour order 31765): 24 vertices, not listed, extent -52.425,18.149 -52.055,18.55
GND on F.Cu "F.Cu-GND-101" (solid, remove dead copper, pour order 31766): 24 vertices, not listed, extent -41.615,4.369 -41.245,4.77
GND on F.Cu "F.Cu-GND-54" (solid, remove dead copper, pour order 31767): 24 vertices, not listed, extent -104.37,12.995 -103.969,13.365
GND on F.Cu "F.Cu-GND-4" (solid, remove dead copper, pour order 31768): 24 vertices, not listed, extent -43.115,4.369 -42.745,4.77
GND on F.Cu "F.Cu-GND-144" (solid, remove dead copper, pour order 31769): 24 vertices, not listed, extent -15.57,34.095 -15.169,34.465
GND on F.Cu "F.Cu-GND-25" (solid, remove dead copper, pour order 31770): 24 vertices, not listed, extent -44.615,4.369 -44.245,4.77
+3V3 on F.Cu "F.Cu-+3V3-72" (solid, remove dead copper, pour order 31771): 24 vertices, not listed, extent -106.2,24.305 -105.799,24.675
+3V3 on F.Cu "F.Cu-+3V3-4" (solid, remove dead copper, pour order 31772): 24 vertices, not listed, extent -53.205,18.599 -52.835,19
+3V3 on F.Cu "F.Cu-+3V3-36" (solid, remove dead copper, pour order 31773): 24 vertices, not listed, extent -55.545,15.589 -55.175,15.99
+3V3 on F.Cu "F.Cu-+3V3-73" (solid, remove dead copper, pour order 31774): 24 vertices, not listed, extent -51.685,15.619 -51.315,16.02
+3V3 on F.Cu "F.Cu-+3V3-25" (solid, remove dead copper, pour order 31775): 24 vertices, not listed, extent -50.07,12.649 -49.7,13.05
{\W\A\K\E\}\ on F.Cu "F.Cu-/~{WAKE}-2" (solid, remove dead copper, pour order 31776): 24 vertices, not listed, extent -103.81,41.865 -103.409,42.235
{\W\A\K\E\}\ on F.Cu "F.Cu-/~{WAKE}-5" (solid, remove dead copper, pour order 31777): 24 vertices, not listed, extent -60.2,42.375 -59.799,42.745
{\W\A\K\E\}\ on F.Cu "F.Cu-/~{WAKE}" (solid, remove dead copper, pour order 31778): 24 vertices, not listed, extent -118.255,43.109 -117.885,43.51
+3V3 on F.Cu "F.Cu-+3V3-6" (solid, remove dead copper, pour order 31779): 24 vertices, not listed, extent -88.765,27.542 -88.395,27.943
+12V on F.Cu "F.Cu-+12V-9" (solid, remove dead copper, pour order 31780): 24 vertices, not listed, extent -32.995,5.841 -32.625,6.242
{\C\L\K\R\E\Q\E\}\ on F.Cu "F.Cu-/M.2 E&M Key/~{CLKREQE}-2" (solid, remove dead copper, pour order 31781): 24 vertices, not listed, extent -115.48,65.325 -115.079,65.695
SUSCLK_WIFI on F.Cu "F.Cu-/LattePanda Module/SUSCLK_WIFI-3" (solid, remove dead copper, pour order 31782): 24 vertices, not listed, extent -81.55,48.425 -81.149,48.795
SUSCLK_WIFI on F.Cu "F.Cu-/LattePanda Module/SUSCLK_WIFI-5" (solid, remove dead copper, pour order 31783): 24 vertices, not listed, extent -59.37,42.945 -58.969,43.315
VPullup on F.Cu "F.Cu-VPullup-5" (solid, remove dead copper, pour order 31784): 24 vertices, not listed, extent -41.025,44.689 -40.655,45.09
GND on F.Cu "F.Cu-GND-10" (solid, remove dead copper, pour order 31785): 24 vertices, not listed, extent -46.115,4.369 -45.745,4.77
GND on F.Cu "F.Cu-GND-75" (solid, remove dead copper, pour order 31786): 24 vertices, not listed, extent -115.7,70.825 -115.299,71.195
FAN_1_PWM on F.Cu "F.Cu-/Fan_Temp/FAN_1_PWM" (solid, remove dead copper, pour order 31787): 24 vertices, not listed, extent -71.514,43.196 -71.083,43.627
+1V0 on F.Cu "F.Cu-+1V0-9" (solid, remove dead copper, pour order 31788): 24 vertices, not listed, extent -96.474,28.496 -96.043,28.927
{\P\L\T\_\R\S\T\}\ on F.Cu "F.Cu-/~{PLT_RST}-4" (solid, remove dead copper, pour order 31789): 24 vertices, not listed, extent -111.897,64.183 -111.466,64.614
GND on F.Cu "F.Cu-GND-117" (solid, remove dead copper, pour order 31790): 24 vertices, not listed, extent -58.884,34.126 -58.453,34.557
+3V3 on F.Cu "F.Cu-+3V3-69" (solid, remove dead copper, pour order 31791): 24 vertices, not listed, extent -52.024,9.399 -51.593,9.829
FAN_1_TAC on F.Cu "F.Cu-/Fan_Temp/FAN_1_TAC" (solid, remove dead copper, pour order 31792): 24 vertices, not listed, extent -71.424,42.406 -70.993,42.837
GND on F.Cu "F.Cu-GND-169" (solid, remove dead copper, pour order 31793): 24 vertices, not listed, extent -15.524,33.926 -15.093,34.357
+3V3 on F.Cu "F.Cu-+3V3-30" (solid, remove dead copper, pour order 31794): 24 vertices, not listed, extent -24.12,29.517 -23.689,29.948
GND on F.Cu "F.Cu-GND-103" (solid, remove dead copper, pour order 31795): 24 vertices, not listed, extent -69.294,34.436 -68.863,34.867
{\P\L\T\_\R\S\T\}\ on F.Cu "F.Cu-/~{PLT_RST}-3" (solid, remove dead copper, pour order 31796): 24 vertices, not listed, extent -111.417,40.846 -110.986,41.277
{\W\A\K\E\}\ on F.Cu "F.Cu-/~{WAKE}-6" (solid, remove dead copper, pour order 31797): 24 vertices, not listed, extent -110.927,41.686 -110.496,42.117
Net-(A1-{\B\I\O\S\_\S\E\L\}\)\ on F.Cu "F.Cu-Net-(A1-~{BIOS_SEL})" (solid, remove dead copper, pour order 31798): 24 vertices, not listed, extent -39.467,38.526 -39.036,38.957
GND on F.Cu "F.Cu-GND-172" (solid, remove dead copper, pour order 31799): 24 vertices, not listed, extent -20.171,34.005 -19.77,34.375
SUSCLK_WIFI on F.Cu "F.Cu-/LattePanda Module/SUSCLK_WIFI" (solid, remove dead copper, pour order 31800): 24 vertices, not listed, extent -74.451,48.425 -74.05,48.795
Net-(Q7-G) on F.Cu "F.Cu-Net-(Q7-G)-2" (solid, remove dead copper, pour order 31801): 24 vertices, not listed, extent -31.095,11.99 -30.725,12.391
Net-(A1-SIO_UART_TX) on F.Cu "F.Cu-Net-(A1-SIO_UART_TX)" (solid, remove dead copper, pour order 31802): 24 vertices, not listed, extent -73.261,44.385 -72.86,44.755
GND on F.Cu "F.Cu-GND-6" (solid, remove dead copper, pour order 31803): 24 vertices, not listed, extent -96.26,35.36 -95.89,35.761
CC1 on F.Cu "F.Cu-/PSU/CC1" (solid, remove dead copper, pour order 31804): 24 vertices, not listed, extent -9.925,15.4 -9.555,15.801
GND on F.Cu "F.Cu-GND-135" (solid, remove dead copper, pour order 31805): 24 vertices, not listed, extent -115.965,52.12 -115.595,52.521
GND on F.Cu "F.Cu-GND-72" (solid, remove dead copper, pour order 31806): 24 vertices, not listed, extent -99.11,32.88 -98.74,33.281
Net-(JP1-C) on F.Cu "F.Cu-Net-(JP1-C)" (solid, remove dead copper, pour order 31807): 24 vertices, not listed, extent -79.115,12.58 -78.745,12.981
SUSCLK_WIFI on F.Cu "F.Cu-/LattePanda Module/SUSCLK_WIFI-7" (solid, remove dead copper, pour order 31808): 24 vertices, not listed, extent -104.565,45.56 -104.195,45.961
GND on F.Cu "F.Cu-GND-180" (solid, remove dead copper, pour order 31809): 24 vertices, not listed, extent -108.221,12.995 -107.82,13.365
Net-(A1-SIO_UART_RX) on F.Cu "F.Cu-Net-(A1-SIO_UART_RX)" (solid, remove dead copper, pour order 31810): 24 vertices, not listed, extent -72.971,45.015 -72.57,45.385
+3V3 on F.Cu "F.Cu-+3V3-39" (solid, remove dead copper, pour order 31811): 24 vertices, not listed, extent -88.765,27.143 -88.395,27.544
+3V3 on F.Cu "F.Cu-+3V3-27" (solid, remove dead copper, pour order 31812): 24 vertices, not listed, extent -131.865,90.69 -131.495,91.091
PWR_EN on F.Cu "F.Cu-/PSU/PWR_EN-8" (solid, remove dead copper, pour order 31813): 24 vertices, not listed, extent -32.635,0.43 -32.265,0.831
PWR_EN on F.Cu "F.Cu-/PSU/PWR_EN-1" (solid, remove dead copper, pour order 31814): 24 vertices, not listed, extent -24.565,20.66 -24.195,21.061
SUSCLK_WIFI on F.Cu "F.Cu-/LattePanda Module/SUSCLK_WIFI-2" (solid, remove dead copper, pour order 31815): 24 vertices, not listed, extent -39.855,37.32 -39.485,37.721
GND on F.Cu "F.Cu-GND-13" (solid, remove dead copper, pour order 31816): 24 vertices, not listed, extent -115.485,70.61 -115.115,71.011
VPullup on F.Cu "F.Cu-VPullup-4" (solid, remove dead copper, pour order 31817): 24 vertices, not listed, extent -27.851,46.195 -27.45,46.565
GND on F.Cu "F.Cu-GND-152" (solid, remove dead copper, pour order 31818): 24 vertices, not listed, extent -118.331,34.345 -117.93,34.715
Net-(A1-{\B\I\O\S\_\S\E\L\}\)\ on F.Cu "F.Cu-Net-(A1-~{BIOS_SEL})-2" (solid, remove dead copper, pour order 31819): 24 vertices, not listed, extent -42.105,42.869 -41.735,43.27
CC1 on F.Cu "F.Cu-/PSU/CC1-1" (solid, remove dead copper, pour order 31820): 24 vertices, not listed, extent -13.67,5.905 -13.269,6.275
GND on F.Cu "F.Cu-GND-173" (solid, remove dead copper, pour order 31821): 24 vertices, not listed, extent -45.855,31.479 -45.485,31.879
GND on F.Cu "F.Cu-GND-31" (solid, remove dead copper, pour order 31822): 24 vertices, not listed, extent -49.605,39.839 -49.235,40.239
GND on F.Cu "F.Cu-GND-151" (solid, remove dead copper, pour order 31823): 24 vertices, not listed, extent -13.095,39.529 -12.725,39.929
GND on F.Cu "F.Cu-GND-154" (solid, remove dead copper, pour order 31824): 24 vertices, not listed, extent -25.095,39.529 -24.725,39.929
GND on F.Cu "F.Cu-GND-49" (solid, remove dead copper, pour order 31825): 24 vertices, not listed, extent -14.595,39.529 -14.225,39.929
GND on F.Cu "F.Cu-GND-64" (solid, remove dead copper, pour order 31826): 24 vertices, not listed, extent -10.095,39.529 -9.725,39.929
GND on F.Cu "F.Cu-GND-17" (solid, remove dead copper, pour order 31827): 24 vertices, not listed, extent -52.595,39.529 -52.225,39.929
GND on F.Cu "F.Cu-GND-44" (solid, remove dead copper, pour order 31828): 24 vertices, not listed, extent -45.095,39.529 -44.725,39.929
GND on F.Cu "F.Cu-GND-65" (solid, remove dead copper, pour order 31829): 24 vertices, not listed, extent -61.595,39.269 -61.225,39.669
GND on F.Cu "F.Cu-GND-161" (solid, remove dead copper, pour order 31830): 24 vertices, not listed, extent -38.595,39.529 -38.225,39.929
GND on F.Cu "F.Cu-GND-164" (solid, remove dead copper, pour order 31831): 24 vertices, not listed, extent -8.595,39.529 -8.225,39.929
GND on F.Cu "F.Cu-GND-27" (solid, remove dead copper, pour order 31832): 24 vertices, not listed, extent -51.095,39.529 -50.725,39.929
GND on F.Cu "F.Cu-GND-85" (solid, remove dead copper, pour order 31833): 24 vertices, not listed, extent -28.095,39.529 -27.725,39.929
GND on F.Cu "F.Cu-GND-81" (solid, remove dead copper, pour order 31834): 24 vertices, not listed, extent -58.595,39.269 -58.225,39.669
GND on F.Cu "F.Cu-GND-1" (solid, remove dead copper, pour order 31835): 24 vertices, not listed, extent -60.095,39.269 -59.725,39.669
GND on F.Cu "F.Cu-GND-56" (solid, remove dead copper, pour order 31836): 24 vertices, not listed, extent -22.095,39.529 -21.725,39.929
GND on F.Cu "F.Cu-GND-145" (solid, remove dead copper, pour order 31837): 24 vertices, not listed, extent -20.595,39.529 -20.225,39.929
GND on F.Cu "F.Cu-GND" (solid, remove dead copper, pour order 31838): 24 vertices, not listed, extent -57.095,39.269 -56.725,39.669
GND on F.Cu "F.Cu-GND-87" (solid, remove dead copper, pour order 31839): 24 vertices, not listed, extent -54.095,39.269 -53.725,39.669
GND on F.Cu "F.Cu-GND-38" (solid, remove dead copper, pour order 31840): 24 vertices, not listed, extent -55.595,39.269 -55.225,39.669
GND on F.Cu "F.Cu-GND-188" (solid, remove dead copper, pour order 31841): 24 vertices, not listed, extent -31.095,39.529 -30.725,39.929
GND on F.Cu "F.Cu-GND-26" (solid, remove dead copper, pour order 31842): 24 vertices, not listed, extent -69.095,39.869 -68.725,40.269
GND on F.Cu "F.Cu-GND-61" (solid, remove dead copper, pour order 31843): 24 vertices, not listed, extent -11.595,39.529 -11.225,39.929
GND on F.Cu "F.Cu-GND-35" (solid, remove dead copper, pour order 31844): 24 vertices, not listed, extent -53.355,33.791 -52.985,34.191
GND on F.Cu "F.Cu-GND-71" (solid, remove dead copper, pour order 31845): 24 vertices, not listed, extent -22.105,41.991 -21.735,42.391
GND on F.Cu "F.Cu-GND-123" (solid, remove dead copper, pour order 31846): 24 vertices, not listed, extent -31.105,41.991 -30.735,42.391
{\W\A\K\E\}\ on F.Cu "F.Cu-/~{WAKE}-7" (solid, remove dead copper, pour order 31847): 24 vertices, not listed, extent -46.855,34.171 -46.485,34.571
GND on F.Cu "F.Cu-GND-5" (solid, remove dead copper, pour order 31848): 24 vertices, not listed, extent -66.855,34.381 -66.485,34.781
GND on F.Cu "F.Cu-GND-130" (solid, remove dead copper, pour order 31849): 24 vertices, not listed, extent -50.355,33.791 -49.985,34.191
GND on F.Cu "F.Cu-GND-62" (solid, remove dead copper, pour order 31850): 24 vertices, not listed, extent -38.855,33.791 -38.485,34.191
GND on F.Cu "F.Cu-GND-74" (solid, remove dead copper, pour order 31851): 24 vertices, not listed, extent -8.605,41.991 -8.235,42.391
GND on F.Cu "F.Cu-GND-114" (solid, remove dead copper, pour order 31852): 24 vertices, not listed, extent -20.605,41.991 -20.235,42.391
GND on F.Cu "F.Cu-GND-59" (solid, remove dead copper, pour order 31853): 24 vertices, not listed, extent -56.355,33.791 -55.985,34.191
GND on F.Cu "F.Cu-GND-16" (solid, remove dead copper, pour order 31854): 24 vertices, not listed, extent -10.105,41.991 -9.735,42.391
GND on F.Cu "F.Cu-GND-86" (solid, remove dead copper, pour order 31855): 24 vertices, not listed, extent -16.105,41.991 -15.735,42.391
GND on F.Cu "F.Cu-GND-174" (solid, remove dead copper, pour order 31856): 24 vertices, not listed, extent -21.855,33.791 -21.485,34.191
GND on F.Cu "F.Cu-GND-80" (solid, remove dead copper, pour order 31857): 24 vertices, not listed, extent -51.855,33.791 -51.485,34.191
GND on F.Cu "F.Cu-GND-147" (solid, remove dead copper, pour order 31858): 24 vertices, not listed, extent -64.605,41.671 -64.235,42.071
GND on F.Cu "F.Cu-GND-70" (solid, remove dead copper, pour order 31859): 24 vertices, not listed, extent -12.855,33.791 -12.485,34.191
GND on F.Cu "F.Cu-GND-146" (solid, remove dead copper, pour order 31860): 24 vertices, not listed, extent -11.605,41.991 -11.235,42.391
GND on F.Cu "F.Cu-GND-36" (solid, remove dead copper, pour order 31861): 24 vertices, not listed, extent -20.355,33.791 -19.985,34.191
GND on F.Cu "F.Cu-GND-148" (solid, remove dead copper, pour order 31862): 24 vertices, not listed, extent -54.855,33.791 -54.485,34.191
GND on F.Cu "F.Cu-GND-32" (solid, remove dead copper, pour order 31863): 24 vertices, not listed, extent -25.105,41.991 -24.735,42.391
GND on F.Cu "F.Cu-GND-139" (solid, remove dead copper, pour order 31864): 24 vertices, not listed, extent -28.105,41.991 -27.735,42.391
GND on F.Cu "F.Cu-GND-67" (solid, remove dead copper, pour order 31865): 24 vertices, not listed, extent -67.61,42.251 -67.24,42.651
GND on F.Cu "F.Cu-GND-99" (solid, remove dead copper, pour order 31866): 24 vertices, not listed, extent -63.105,41.661 -62.735,42.061
GND on F.Cu "F.Cu-GND-23" (solid, remove dead copper, pour order 31867): 24 vertices, not listed, extent -28.855,33.791 -28.485,34.191
GND on F.Cu "F.Cu-GND-122" (solid, remove dead copper, pour order 31868): 24 vertices, not listed, extent -9.855,33.791 -9.485,34.191
GND on F.Cu "F.Cu-GND-33" (solid, remove dead copper, pour order 31869): 24 vertices, not listed, extent -14.605,41.991 -14.235,42.391
GND on F.Cu "F.Cu-GND-110" (solid, remove dead copper, pour order 31870): 24 vertices, not listed, extent -57.105,41.991 -56.735,42.391
GND on F.Cu "F.Cu-GND-79" (solid, remove dead copper, pour order 31871): 24 vertices, not listed, extent -48.855,33.791 -48.485,34.191
GND on F.Cu "F.Cu-GND-189" (solid, remove dead copper, pour order 31872): 24 vertices, not listed, extent -44.355,33.791 -43.985,34.191
GND on F.Cu "F.Cu-GND-143" (solid, remove dead copper, pour order 31873): 24 vertices, not listed, extent -14.355,33.791 -13.985,34.191